# Altium PCB Ultra-Mega-PS-PCB.PcbDoc
Units mm, origin at the board's own origin, x right, y up, seen from the top; angles counter-clockwise.
Board outline 127.08 x 64.9 mm, 4 copper layers (Component Side, Ground Plane, Power Plane, Solder Side), stack 0.844 mm thick; 99 components, 48 nets, 279 pads, 237 vias.
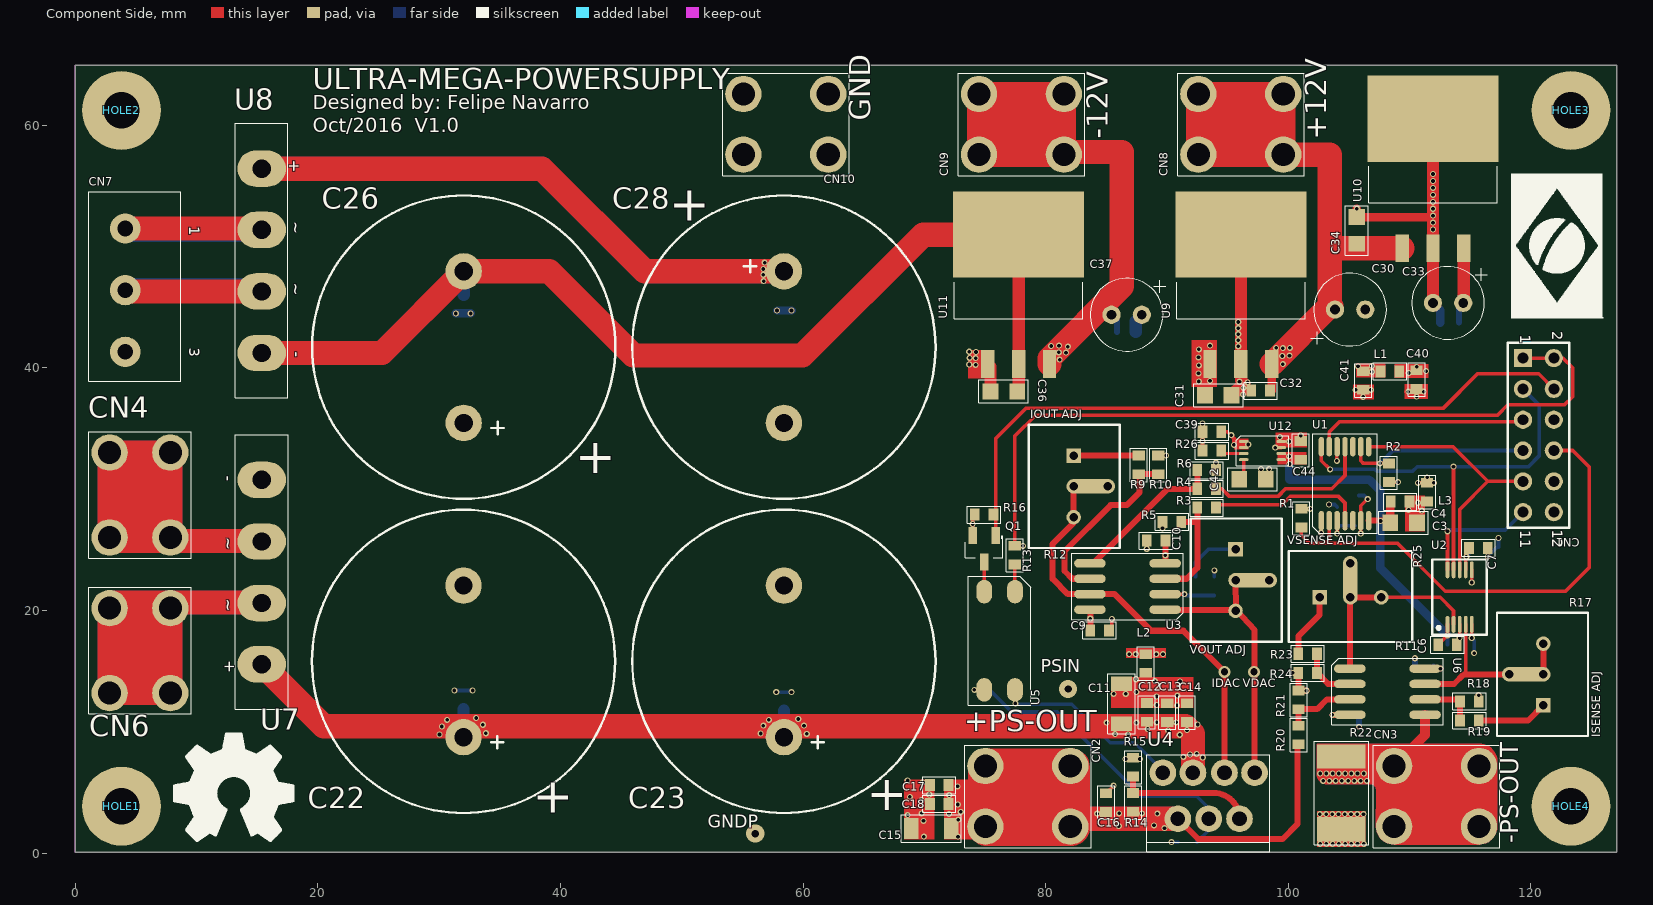
[diagram p0: Component Side view]
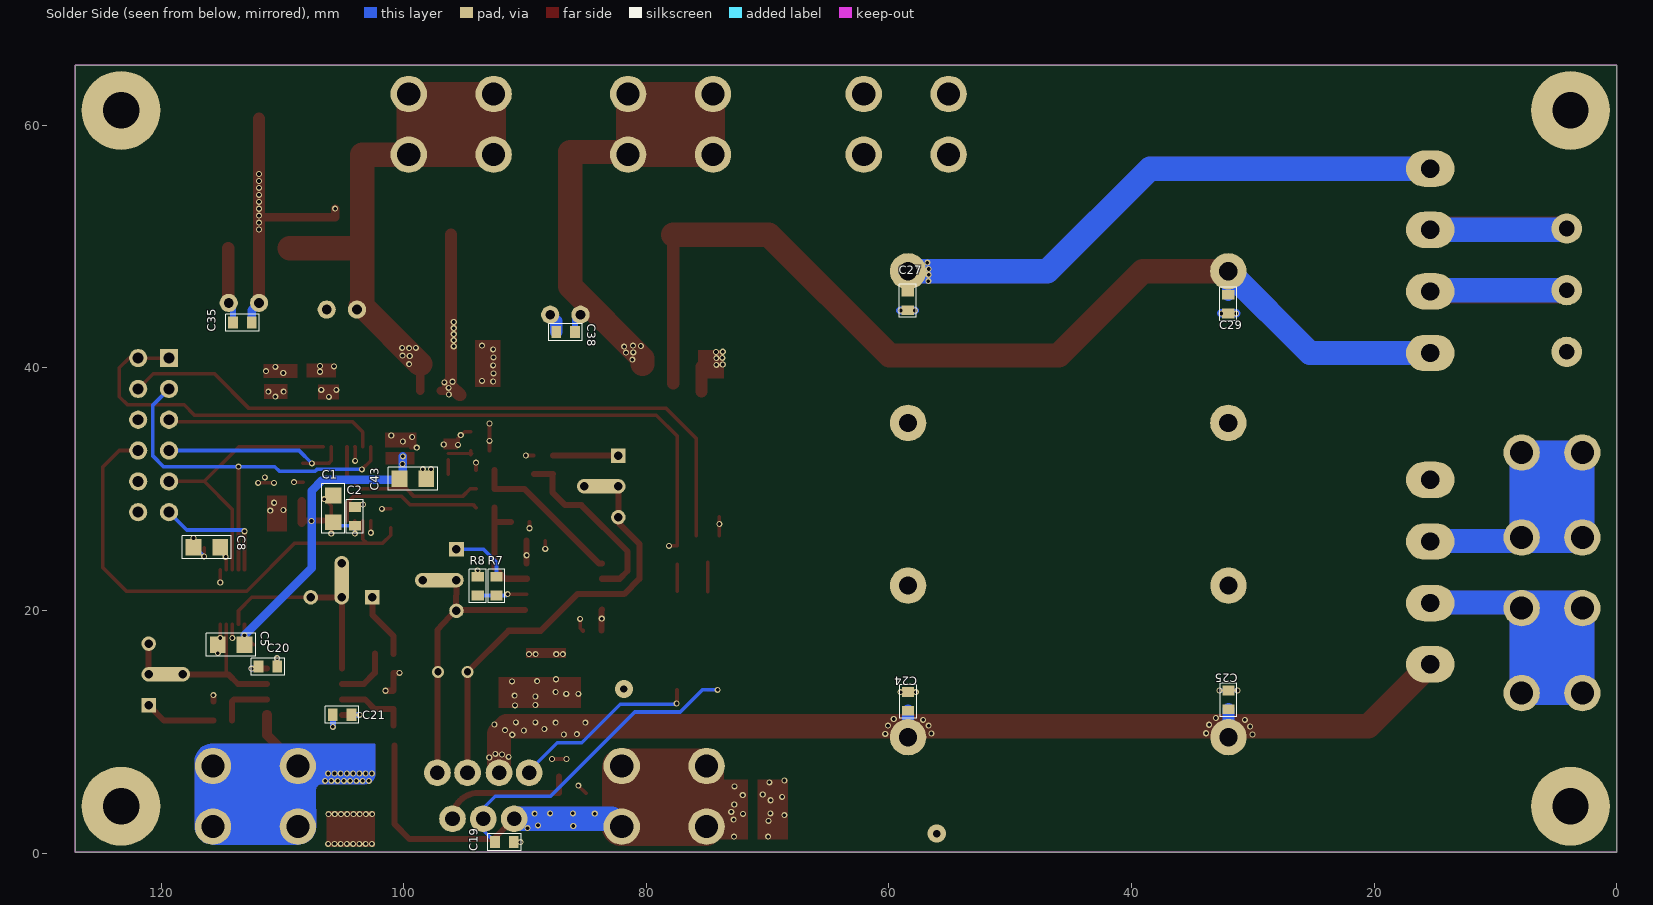
[diagram p1: Solder Side view, seen from below]
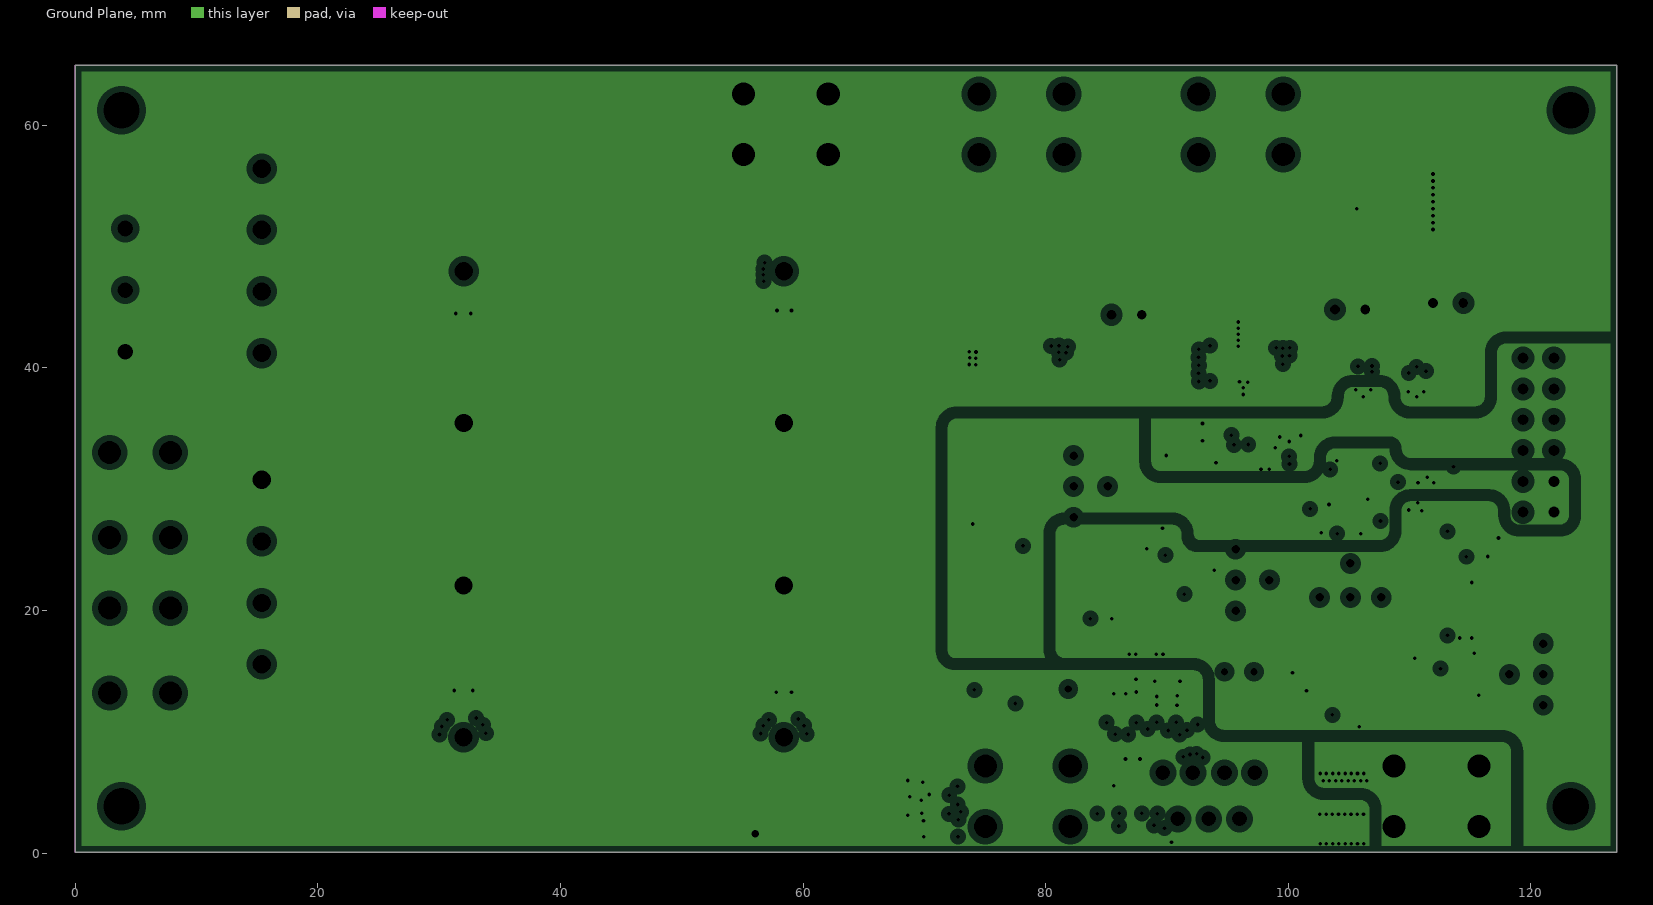
[diagram p2: Ground Plane, clearances drawn from the general rule]
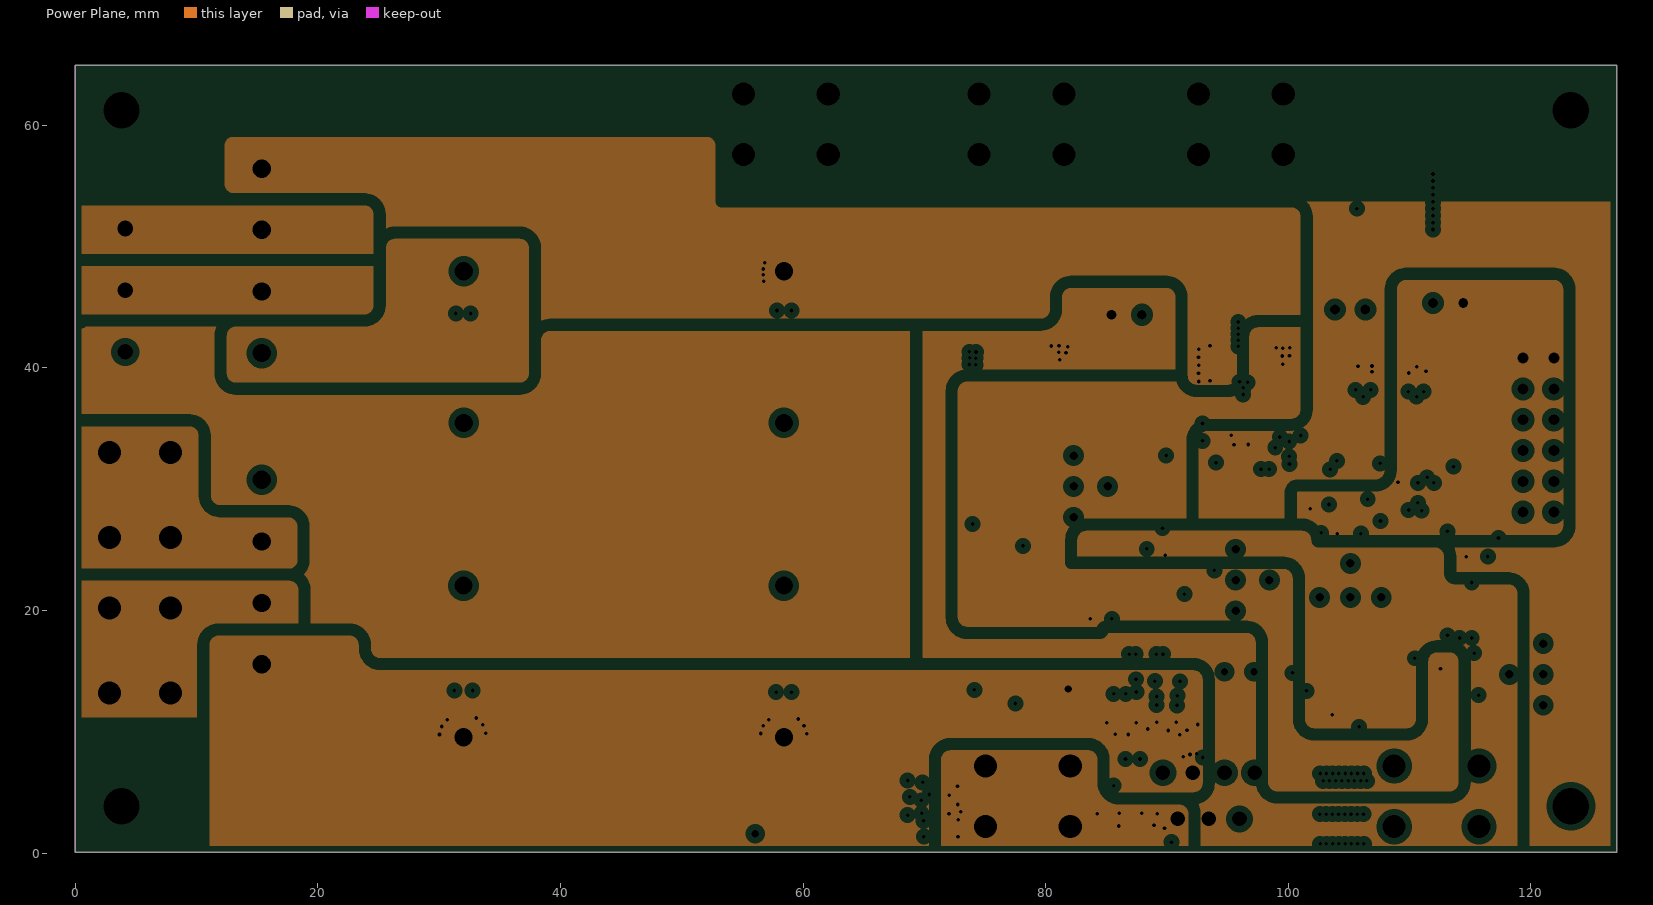
[diagram p3: Power Plane, clearances drawn from the general rule]

## Layer stack, top to bottom
Top Solder: solder mask 0.0102, Solder Resist, Dk 3.5
Component Side: signal copper 0.0356
Dielectric 1: core 0.32, FR-4, Dk 4.8
Ground Plane: plane copper 0.036, net (Multiple Nets)
Dielectric 3: prepreg 0.127, Dk 4.2
Power Plane: plane copper 0.036, net (Multiple Nets)
Dielectric 4: core 0.254, Dk 4.2
Solder Side: signal copper 0.0356
Bottom Solder: solder mask 0.0102, Solder Resist, Dk 3.5

## Board outline
0,0.05 127.075,0.05 127.075,64.95 0,64.95

## Design rules (kind name [scope] priority, off if disabled: settings)
Clearance [All] p1: gap=0.254
HoleToHoleClearance [All] p1 off: gap=0.254 allowstackedmicrovias=TRUE
MinimumSolderMaskSliver [All] p1 off: minsoldermaskwidth=0.254
PlaneClearance [All] p1: clearance=0.508
PlaneConnect [All] p1: planeconnectstyle=Direct reliefexpansion=0.508 reliefentries=4 reliefconductorwidth=0.254 reliefairgap=0.254
PolygonConnect [All] p1: connectstyle=Direct reliefconductorwidth=0.254 reliefentries=4 polygonreliefangle="90 Angle" airgapwidth=0.254
RoutingVias [All] p1: holewidth=0.711 width=1.27 viastyle="Through Hole" minholewidth=0.711 minwidth=1.27 maxholewidth=3 maxwidth=3
SilkToSilkClearance [All] p1 off: silktosilkclearance=0.254
SilkToSolderMaskClearance [IsPad] p1 off: minsilkscreentomaskgap=0.254 clearancetoexposedcopper=TRUE
SolderMaskExpansion [All] p1: expansion=0.102
Width [All] p1: maxlimit=5 minlimit=0.254 preferedwidth=0.254
24 further rules are at their usual default settings.

## Classes and differential pairs
component class Ultra-Mega-PS-Block-V1.00: CN1 HOLE1 HOLE2 HOLE3 HOLE4
component class "Power Supplies": C22 C23 C24 C25 C26 C27 C28 C29 C30 C31 C32 C33 C34 C35 C36 C37 C38 C39 C40 C41 C42 C43 C44 CN4 CN6 CN7 CN8 CN9 CN10 L1 L2 L3 R26 U7 U8 U9 U10 U11 U12
component class "Power Stage": C11 C12 C13 C14 C15 C16 C17 C18 C19 C20 C21 CN2 CN3 Q1 R13 R14 R15 R16 R17 R18 R19 R20 R21 R22 R23 R24 R25 U4 U5 U6
component class DAC/ADC: C1 C2 C3 C4 C5 C6 C7 C8 C9 C10 R1 R2 R3 R4 R5 R6 R7 R8 R9 R10 R11 R12 U1 U2 U3

## Components (designator, comment, footprint, x,y, rotation, side; value= is the part's Value field where it differs from the comment)
C1 "Capacitor Cerâmico" CC0805 105.8,28.375 r270 bottom
C2 "Capacitor Cerâmico" CC0603 104.025,27.75 r270 bottom
C3 "Capacitor Cerâmico" CC0805 109.5,27.225 r180 top
C4 "Capacitor Cerâmico" CC0603 109.225,28.975 r180 top
C5 "Capacitor Cerâmico" CC0805 114.225,17.175 r180 bottom
C6 "Capacitor Cerâmico" CC0603 113.125,17.175 r180 top
C7 "Capacitor Cerâmico" CC0603 115.675,25.15 r180 top
C8 "Capacitor Cerâmico" CC0805 116.225,25.2 r180 bottom
C9 "Capacitor Cerâmico" CC0603 84.45,18.35 r180 top
C10 "Capacitor Cerâmico" CC0603 89.1,25.75 r0 top
C11 "Capacitor Cerâmico" CC1206 86.25,12.3 r270 top
C12 "Capacitor Cerâmico" CC0603 88.35,11.6 r270 top
C13 "Capacitor Cerâmico" CC0603 90.025,11.575 r270 top
C14 "Capacitor Cerâmico" CC0603 91.65,11.575 r270 top
C15 "Capacitor Cerâmico" CC1206 70.575,2.025 r0 top
C16 "Capacitor Cerâmico" CC0603 84.975,4.15 r270 top
C17 "Capacitor Cerâmico" CC0603 71.225,5.6 r0 top
C18 "Capacitor Cerâmico" CC0603 71.225,4.05 r0 top
C19 "Capacitor Cerâmico" CC0603 91.7,0.9 r0 bottom
C20 "Capacitor Cerâmico" CC0603 111.2,15.375 r0 bottom
C21 "Capacitor Cerâmico" CC0603 105.075,11.395 r180 bottom
C22 "Capacitor Eletrolítico" "CAP NICHICON 25x40" 32.004,15.798 r270 top
C23 "Capacitor Eletrolítico" "CAP NICHICON 25x40" 58.42,15.798 r270 top
C24 "Capacitor Cerâmico" CC0603 58.42,12.496 r270 bottom
C25 "Capacitor Cerâmico" CC0603 32.004,12.623 r270 bottom
C26 "Capacitor Eletrolítico" "CAP NICHICON 25x40" 58.42,41.706 r90 top
C27 "Capacitor Cerâmico" CC0603 58.45,45.525 r90 bottom
C28 "Capacitor Eletrolítico" "CAP NICHICON 25x40" 32.019,41.706 r270 top
C29 "Capacitor Cerâmico" CC0603 32.025,45.25 r270 bottom
C30 "Capacitor Eletrolítico" CPOLRAD6X12 105.1,44.8 r180 top
C31 "Capacitor Cerâmico" CC0805 94.225,37.75 r180 top
C32 "Capacitor Cerâmico" CC0603 97.725,38.125 r0 top
C33 "Capacitor Eletrolítico" CPOLRAD6X12 113.175,45.35 r0 top
C34 "Capacitor Cerâmico" CC0805 105.65,51.325 r270 top
C35 "Capacitor Cerâmico" CC0603 113.3,43.725 r0 bottom
C36 "Capacitor Cerâmico" CC0805 76.55,38.05 r0 top
C37 "Capacitor Eletrolítico" CPOLRAD6X12 86.675,44.375 r0 top
C38 "Capacitor Cerâmico" CC0603 86.65,42.95 r180 bottom
C39 "Capacitor Cerâmico" CC0603 93.7,34.725 r0 top
C40 "Capacitor Cerâmico" CC0603 110.575,39.025 r90 top
C41 "Capacitor Cerâmico" CC0603 106.175,38.95 r90 top
C42 "Capacitor Cerâmico" CC0805 97.05,30.825 r180 top
C43 "Capacitor Cerâmico" CC0805 99.25,30.85 r0 bottom
C44 "Capacitor Cerâmico" CC0603 101.025,33.2 r270 top
CN1 "Header 6X2" "CONN HDR2X6" 119.35,40.8 r270 top
CN2 "Screw M3" CONN_MASSA-M3 78.525,4.675 r90 top
CN3 "Screw M3" CONN_MASSA-M3 112.225,4.675 r90 top
CN4 "Screw M3" CONN_MASSA-M3 5.334,29.514 r0 top
CN6 "Screw M3" CONN_MASSA-M3 5.334,16.687 r0 top
CN7 "Screw" "CONN SCREW-3N P5.08" 4.121,46.4 r270 top
CN8 "Screw M3" CONN_MASSA-M3 96.083,60.075 r90 top
CN9 "Screw M3" CONN_MASSA-M3 78,60.075 r90 top
CN10 "Screw M3" CONN_MASSA-M3 58.575,60.075 r90 top
HOLE1 "Furo de Fixação" Furo_M3 3.81,3.86 r0 top
HOLE2 "Furo de Fixação" Furo_M3 3.81,61.225 r0 top
HOLE3 "Furo de Fixação" Furo_M3 123.3,61.225 r0 top
HOLE4 "Furo de Fixação" Furo_M3 123.3,3.86 r0 top
L1 "Bead" CC0603 108.375,39.7 r180 top
L2 "Bead" CC0603 88.25,15.625 r90 top
L3 "Bead" CC0603 111.45,29.75 r270 top
Q1 "BSS138L" SOT-23-3N 74.925,25.075 r270 top
R1 "Resistor" CC0603 101.075,27.6 r90 top
R2 "Resistor" CC0603 108.3,31.35 r270 top
R3 "Resistor" CC0603 93.275,28.475 r0 top
R4 "Resistor" CC0603 93.275,30.025 r0 top
R5 "Resistor" CC0603 90.4,27.3 r0 top
R6 "Resistor" CC0603 93.275,31.575 r180 top
R7 "Resistor" CC0603 92.35,22 r270 bottom
R8 "Resistor" CC0603 93.9,22 r90 bottom
R9 "Resistor" CC0603 87.675,32 r270 top
R10 "Resistor" CC0603 89.275,32 r90 top
R11 "Potenciômetro" POT 95.65,22.5 r270 top locked
R12 "Potenciômetro" POT 82.3,30.225 r270 top
R13 "Resistor" CC0603 77.45,24.55 r270 top
R14 "Resistor" CC0603 87.2,4.175 r90 top
R15 "Resistor" CC0603 87.2,7.075 r270 top
R16 "Resistor" CC0603 74.925,27.9 r0 top
R17 "Potenciômetro" POT 121.025,14.725 r90 top
R18 "Resistor" CC0603 114.925,12.5 r180 top
R19 "Resistor" CC0603 114.925,10.925 r0 top
R20 "Resistor" CC0603 100.85,9.725 r270 top
R21 "Resistor" CC0603 100.85,12.625 r270 top
R22 "Resistor" CC2512 104.375,4.95 r90 top
R23 "Resistor" CC0603 101.6,16.425 r0 top
R24 "Resistor" CC0603 101.6,14.85 r180 top
R25 "Potenciômetro" POT 105.125,21.075 r0 top
R26 "Resistor" CC0603 93.7,33.175 r0 top
U1 "DAC60004" TSSOP-14N 104.675,30.45 r90 top
U2 "ADC122S625" MSOP10 114.125,21.1 r90 top
U3 "OPA2197" SOIC-8N 86.75,21.975 r180 top
U4 "OPA548" TO-220-7N 93.439,2.819 r180 top
U5 "PC817XNNIP0F" SMD-4N 76.2,17.5 r270 top
U6 "OPA2197" SOIC-8N 108.175,13.3 r0 top
U7 "GBU1006" GBU1006 15.367,23.164 r270 top
U8 "GBU1006" GBU1006 15.367,48.818 r90 top
U9 "LM2940CS-12" TO263-4N 96.087,46.85 r90 top
U10 "LM2940CS-5" TO263-4N 111.925,56.4 r90 top
U11 "LM2990S-12" TO263-4N 77.775,46.85 r90 top
U12 "REF6045" VFSOP-8N 97.875,33.175 r0 top

## Footprints (in the part's own frame and the unit in brackets; to place one, negate y for a bottom-side part, rotate by r counter-clockwise, add the part's x,y. Pads: shape width x height; smd on the part's side, far side on the other; paste and mask are expansions set on the pad)
"CAP NICHICON 25x40" [mm]
  round 3 hole 1.5: 1(-6.25,0) 2(6.25,0)
  silkscreen extent -12.5,-12.5 12.5,12.5, body extent -12.7,-12.71 12.7,12.69, height 42.2
CC0603 [mm] "Chip Resistor, 2-Leads, Body 1,6x0,8mm, IPC Medium Density"
  rect 0.8x1 smd: 1(-0.77,0) 2(0.77,0)
  silkscreen extent -1.38,-0.7 1.38,0.7, body extent -0.8,-0.42 0.8,0.43, height 0.45
CC0805 [mm] "Chip Resistor, 2-Leads, Body 2,0x1,2mm, IPC Medium Density"
  rect 1.3x1.35 smd: 1(-1.1,0) 2(1.1,0)
  silkscreen extent -2.05,-0.95 2.02,0.95, body extent -1,-0.62 1,0.63, height 0.6
CC1206 [mm] "Chip Resistor, 2-Leads, Body 3,2x1,6mm, IPC Medium Density"
  rect 1.2x1.75 smd: 1(-1.65,0) 2(1.65,0)
  silkscreen extent -2.47,-1.15 2.47,1.15, body extent -1.6,-0.8 1.6,0.8, height 1
CC2512 [mm] "Chip Resistor, 2-Leads, Body 6,5x3,3mm, IPC High Density"
  rect 2x4 smd: 1(-3,0) 2(3,0)
  silkscreen extent -4.26,-2.26 4.25,2.25, body extent -3.17,-1.6 3.18,1.6, height 0.47
"CONN HDR2X6" [mm] "Connector; Header; 6x2 Position"
  rect 1.5x1.5 hole 0.9: 1(0,0)
  round 1.5 hole 0.9: 2(0,2.54) 3(2.54,0) 4(2.54,2.54) 5(5.08,0) 6(5.08,2.54) 7(7.62,0) 8(7.62,2.54) 9(10.16,0) 10(10.16,2.54) 11(12.7,0) 12(12.7,2.54)
  silkscreen extent -1.27,-1.27 13.97,3.81, body extent -1.27,-1.27 13.97,3.81, height 8.51
"CONN SCREW-3N P5.08" [mm]
  round 2.5 hole 1.3: 1(-5.08,0) 2(0,0) 3(5.08,0)
  silkscreen extent -8.11,-3.01 7.49,4.59, body extent -8.11,-3.01 7.49,4.59, height 10
CONN_MASSA-M3 [mm]
  round 3 hole 1.9: 1(-2.5,-3.5) 2(2.5,-3.5) 3(2.5,3.5) 4(-2.5,3.5)
  silkscreen extent -4.22,-5.22 4.22,5.21, body extent -4,-4 4,4, height 8.5
CPOLRAD6X12 [mm]
  round 1.5 hole 0.8: 1(1.25,0) 2(-1.25,0)
  silkscreen extent -3,-3 3.24,3, body extent -2.98,-3.01 3,2.98, height 12
Furo_M3 [mm] "Furo metalizado para parafuso M3"
  round 6.5 hole 3 paste+0: X(0,0)
  body extent -2.8,-2.8 2.8,2.8, height 2.38
GBU1006 [mm] "Conversosr DC-DC, SIP, 4 Pin"
  oval 3x4 hole 1.5: 1(-7.6,0) 2(-2.52,0) 3(2.56,0) 4(7.6,0)
  silkscreen extent -11.3,-2.16 11.32,2.2, body extent -11.15,-1.5 11.15,2.06, height 22.83
MSOP10 [mm]
  oval 1.4x0.3 smd: 1(-2.25,1) 2(-2.25,0.5) 3(-2.25,0) 4(-2.25,-0.5) 5(-2.25,-1) 6(2.25,-1) 7(2.25,-0.5) 8(2.25,0) 9(2.25,0.5) 10(2.25,1)
  silkscreen extent -3.1,-2.25 3.1,2.25, body extent -2.5,-1.5 2.53,1.5, height 1.05
POT [mm] "Thru-Hole; 3 Leads"
  rect 1.2x1.2 hole 0.7: 1(-2.54,0)
  oval 1.2x4 hole 0.7 copper offset 0,1.4: 2(0,0)
  round 1.2 hole 0.7: 3(2.54,0)
  silkscreen extent -5.08,-3.68 5.08,3.82, body extent -4.6,-2.41 4.6,2.39, height 12.01
SMD-4N [mm] "SOP, 4-Leads, Body 4,6x6,5mm (max), Pitch 2,54mm, IPC Medium Density"
  oval 1.95x1.3 smd: 1(-4.05,1.27) 2(-4.05,-1.27) 3(4.05,-1.27) 4(4.05,1.27)
  silkscreen extent -5.31,-2.58 5.32,2.59, body extent -5.1,-2.29 5.06,2.3, height 3.85
SOIC-8N [mm] "SOIC, 8-Leads, Body 4.9x3.9mm, Pitch 1.27mm, IPC Medium Density"
  oval 2.6x0.7 smd: 1(-3.1,1.905) 2(-3.1,0.635) 3(-3.1,-0.635) 4(-3.1,-1.905) 5(3.1,-1.905) 6(3.1,-0.635) 7(3.1,0.635) 8(3.1,1.905)
  silkscreen extent -4.61,-2.73 4.6,2.76, body extent -2.9,-2.4 2.9,2.4, height 1.75
SOT-23-3N [mm] "SOT23, 3-Leads, Body 3,1x2,7mm (max), Pitch 0,95mm, IPC Medium Density"
  rect 1.4x0.7 smd: 1(-1.1,0.95) 2(-1.1,-0.95) 3(1.1,0)
  silkscreen extent -1.1,-1.55 0.75,1.55, body extent -1.4,-1.45 1.4,1.45, height 1.25
TO263-4N [mm] "D2-PAK, 4-Pads, Body 8,9x10,4mm (max), IPC High Density"
  rect 2.3x1.1 smd: 1(-6.545,2.54) 2(-6.545,0) 3(-6.545,-2.54)
  rect 7.1x10.8 smd: 4(4.13,0)
  silkscreen extent -2.8,-5.3 0.2,5.3, body extent -7.74,-5 7.93,5, height 4.78
TO-220-7N [mm]
  round 2.2 hole 1.2: 1(-3.78,-3.8) 2(-2.54,0) 3(-1.3,-3.8) 4(0,0) 5(1.3,-3.8) 6(2.54,0) 7(3.78,-3.8)
  silkscreen extent -5.05,-5.29 5.11,2.72, body extent -5.05,-4.02 5.11,2.72, height 21.3
TSSOP-14N [mm] "TSsOP, 14-Leads, Body 5,1x4,5mm (max), Pitch 0,65mm, IPC High Density"
  oval 1.6x0.45 smd: 1(-3.05,1.95) 2(-3.05,1.3) 3(-3.05,0.65) 4(-3.05,0) 5(-3.05,-0.65) 6(-3.05,-1.3) 7(-3.05,-1.95) 8(3.05,-1.95) 9(3.05,-1.3) 10(3.05,-0.65) 11(3.05,0) 12(3.05,0.65) 13(3.05,1.3) 14(3.05,1.95)
  silkscreen extent -4.1,-2.65 4.1,2.65, body extent -3.2,-2.55 3.2,2.55, height 1.2
VFSOP-8N [mm] "TSSOP, 8-Leads, Body 2,1x2,4mm (max), Pitch 0,50mm, IPC Medium Density"
  oval 0.8x0.25 smd: 1(-1.55,0.75) 2(-1.55,0.25) 3(-1.55,-0.25) 4(-1.55,-0.75) 5(1.55,-0.75) 6(1.55,-0.25) 7(1.55,0.25) 8(1.55,0.75)
  silkscreen extent -2.15,-1.24 2.16,1.24, body extent -1.2,-1.05 1.2,1.05, height 0.9

## Part data
C1 C3 C5 C8 C31 C34 C36 C42 C43: library part "Cap 10uF 25V 0805 X5R", "Capacitor (Semiconductor SIM Model)"
C2 C4 C6 C7 C9 C10 C12 C16 C19 C20 C21 C24 C25 C27 C29 C32 C35 C38 C39 C40 C41 C44: library part "Cap 100nF 50V 0603 X7R", "Capacitor (Semiconductor SIM Model)"
C11 C15: library part "Cap 10uF 50V 1206 X5R", "Capacitor (Semiconductor SIM Model)"
C13 C17: library part "Cap 10nF 50V 0603 X7R 5%", "Capacitor (Semiconductor SIM Model)"
C14 C18: library part "Cap 1nF 50V 0603 X7R", "Capacitor (Semiconductor SIM Model)"
C22 C23 C26 C28: library part "PCap 4700uF 63V", "Polarized Capacitor (Radial)"
C30 C33 C37: library part "PCap 47uF 63V 6d.x12h.", "Polarized Capacitor (Radial)"
CN1: "Header, 6-Pin, Dual row"
CN2 CN3 CN4 CN6 CN8 CN9 CN10: library part "Screw Snap-Fit M3", "TERM PCB SNAP-IN VERT M3 THREAD"
CN7: library part "Screw-3 125V 6A P2.54mm", "Conector Screw Block"
HOLE1 HOLE2 HOLE3 HOLE4: library part Parafuso, "Furo para parafuso"
L1 L2 L3: library part "Bd 1K@100MHz 0603 400mA"
Q1: library part "TRS BSS138 50V 200mA SOT-23-3N", "N-Channel Power MOSFET"
R1 R2 R16: library part "Res 10K 1% 0603 1/10W"
R3 R4 R5 R6 R7 R8 R9 R10 R18 R19 R20 R21 R23 R24 R26: library part "Res - $Val $% $Footprint $Pot"
R11 R12 R17 R25: library part "Res Trim", "Trimmer"
R13: library part "Res 470R 5% 0603 1/10W"
R14: library part "Res 9K09 1% 0603 1/10W"
R15: library part "Res 1K 1% 0603 1/10W"
R22: library part "Res 0R01 1% 2512 3W"
U1: library part DAC6004, "DACx0004, Quad 16-,14-,12-Bit, 1 LSB INL, Buffered, Voltage-Output Digital-to-Analog  Converters"
U2: "ADC122S625 Dual 12-Bit, 50 kSPS to 200 kSPS, Simultaneous Sampling A/D Converter"
U3 U6: "OPAx197 36-V, Precision, Rail-to-Rail Input/Output, Low Offset Voltage, Operational Amplifiers"
U4: "High-Voltage, High-Current  OPERATIONAL AMPLIFIER"
U5: library part "OPT PC817", "4-Pin Phototransistor Optocoupler"
U7 U8: library part "BRG GBU1006 600V 10A", "600V 10A"
U9 U10: library part LM2940-15, "Regulador Linear 15V Positivo"
U11: library part LM2990-15, "Regulador Linear 15V Negativo"
U12: library part REF6050, "REF60xx High-Precision Voltage Reference With Integrated ADC Drive Buffer"

## Via types
v1: diameter 0.5, hole 0.3, Component Side to Solder Side, tented both sides, 229 vias
v2: diameter 1.2, hole 0.7, Component Side to Solder Side, 4 vias
v3: diameter 1, hole 0.6, Component Side to Solder Side, 2 vias
v4: diameter 1.5, hole 0.6, Component Side to Solder Side, 2 vias

## Nets (pads, with @x,y where several pads share a name; then routed paths per layer and width w, separated by ;. In a path a pad name is that pad's centre, name@x,y a point inside that pad or via, vN(x,y) a via of type N, cw(c..) or ccw(c..) an arc to the next point about the centre after c; other vN are vias at no path point)
4V5REF: C3.2 C4.2 C5.2 C6.2 C43.2 C44.2 U1.7 U2.1 U12.5 U12.6 | length 31.6
  Component Side w0.3: U12.5 99.8,32.425 v1(100.075,32.7) 99.85,32.925 U12.6 ; C6.2 112.355,17.18 v1(113.125,17.95) U2.1
  Component Side w0.5: U1.7 C3.2@108.225,27.4
  Component Side w0.7: C3.2@108.405,27.23 C4.2@108.405,29
  Solder Side w0.3: C5.2 v1(113.125,17.95)
  Solder Side w0.7: v1(100.075,32.7) 100.075,30.825 100.125,30.775 106.65,30.775 106.696,30.729 106.725,30.729 107.6,29.854 v1(107.6,27.375) 107.6,23.475 v1(113.125,17.95)
  other v1: 100.1,32.075
5V: C1.2 C2.2 C33.1 C35.2 C40.2 CN1.1 CN1.2 L1.1 R1.2 R2.2 R13.1 U1.3 U10.3 | length 76.3
  Component Side w0.3: v1(78.13,25.32) R13.1 77.45,34.375 79.175,36.1 117.25,36.1 118.1,36.95 122.775,36.95 123.45,37.625 123.45,40 122.65,40.8 CN1.2 CN1.1 ; R1.2 v1@101.805,28.37 ; v1(104.025,26.325) U1.3 ; R2.2 v1(109.045,30.58) ; v1(109.93,39.57) C40.2@110.575,39.57 ; C40.2@110.575,39.525 110.775,39.725 v1(111.35,39.725)
  Component Side w1: C33.1@114.465,45.39 U10.3
  Solder Side w0.3: v1(104.025,26.325) C2.2 C1.2@105.505,26.98 ; C33.1@114.07,44.995 C33.1
  Solder Side w0.5: C35.2 C33.1@114.07,44.995
  other v1: 101.8,28.37 110.575,40.075
5VA: C7.2 C8.2 C39.2 C41.2 L1.2 U2.7 U12.1 U12.2 | length 6.1
  Component Side w0.3: C39.2 94.975,34.725 95.525,34.175 v1(95.525,33.65) ; U12.2 95.75,33.425 v1(95.525,33.65) ; U12.1 95.8,33.925 v1(95.525,33.65) ; U2.7 C7.2@114.625,24.87
  Solder Side w0.3: v1(114.675,24.425) 115.125,24.875 C8.2
  other v1: 96.7,33.675 95.3,34.45 106.9,39.675 105.75,40.125 106.9,40.15
30VP: C11.2 C12.2 C13.2 C14.2 C22.2 C23.2 C24.2 C25.2 U4.5 U7.4 | length 86.8
  Component Side w2: U7.4 20.481,10.45 91.525,10.45 92.139,9.836 U4.5
  Solder Side w1: C22.2 C25.2 ; C23.2 C24.2
  other v1: 92.948,7.879 91.35,7.925 91.9,8.125 92.45,8.175 91.05,9.75 30.025,9.775 86.8,9.775 85.725,9.8 60.3,9.825 56.5,9.85 33.85,9.875 90.1,10.1 91.65,10.125 88.4,10.225 30.225,10.425 56.725,10.5 60.075,10.5 33.6,10.575 92.525,10.6 85.025,10.75 87.475,10.75 89.15,10.775 90.75,10.775 30.65,10.975 57.175,10.975 59.6,11.05 33.05,11.125
  other v4: 81.85,13.525
+12VA: C9.2 C20.2 C30.1 C32.2 C34.2 CN8.1 CN8.2 CN8.3 CN8.4 U3.8 U6.8 U9.3 U10.1 | length 58.9
  Component Side w0.5: U3.8 cw(c83.578,19.998) 83.68,19.998 C9.2 ; U6.8 v1(112.545,15.205) U6.8@112.55,15.2
  Component Side w0.7: C32.2@98.627,38.125 U9.3
  Component Side w2: U9.3 C30.1@103.425,45.103 ; 103.545,49.855 U10.1 ; C30.1@103.547,45.103 C30.1@103.425,45.103 ; CN8.1 CN8.4 CN8.3 CN8.2 CN8.1 ; CN8.1 103.425,57.575 C30.1@103.425,45.103
  Solder Side w0.5: C20.2 112.14,15.205 v1(112.545,15.205)
  other v1: 83.675,19.325 99.55,40.3 99.5,40.975 100.1,41 99.55,41.625 99,41.65 100.125,41.65
+15V: C26.2 C27.2 C31.2 U8.4 U9.1 | length 95.4
  Component Side w1: v1@92.63,40.305 U9.1 v1(93.547,38.922)
  Component Side w2: U8.4 38.482,56.418 46.945,47.956 C26.2
  Solder Side w2: U8.4 38.482,56.418 46.945,47.956 C26.2
  other v1: 92.625,38.875 93.547,38.922 92.6,39.537 92.63,40.2 92.6,40.862 92.625,41.525 93.547,41.822 56.75,47.15 56.725,47.675 56.725,48.15 56.825,48.675
+VOUT: C15.2 C16.2 C17.2 C18.2 CN2.1 CN2.2 CN2.3 CN2.4 R14.1 R20.2 U4.6 | length 35.7
  Component Side w0.5: U4.6 92.563,1.155 99.53,1.155 100.775,2.4 R20.2@100.775,8.88
  Component Side w2: CN2.1@82.125,2.1 82.844,2.819 U4.6
  Solder Side w2: CN2.1@82.125,2.1 82.844,2.819 U4.6
  other v1: 72.775,1.35 89.8,2.05 86.025,2.225 88.925,2.275 72.8,2.75 72.025,3.225 84.25,3.25 89.2,3.25 86.05,3.275 87.925,3.275 73,3.4 72.75,4 72.05,4.775 72.725,5.5
-12VA: C10.2 C19.2 C21.2 C37.2 C38.2 CN9.1 CN9.2 CN9.3 CN9.4 U3.4 U4.4 U5.3 U6.4 U11.3 | length 81.1
  Component Side w0.3: v1(74.125,13.45) U5.3
  Component Side w0.5: U3.4@89.87,23.88 C10.2 ; v1(103.63,11.395) U6.4
  Component Side w2: U11.3 80.315,40.765 86.275,46.725 86.275,57.8 81.725,57.8 CN9.1 ; CN9.1 CN9.2 CN9.3 CN9.4 CN9.1
  Solder Side w0.3: v1(74.125,13.45) 75.375,13.45 77.204,11.621 80.954,11.621 87.9,4.675 92.45,4.675 93.439,3.686 U4.4 93.439,1.87 C19.2
  Solder Side w0.5: C38.2 C37.2@85.88,43.92 ; v1(103.63,11.395) C21.2
  other v1: 89.87,24.55 81.15,40.675 81.675,41.25 81.075,41.275 81.825,41.75 80.45,41.8 81.1,41.825
-15V: C28.1 C29.1 C36.2 U8.1 U11.2 U11.4 | length 105.8
  Component Side w1: C36.2@77.775,38.705 U11.2 U11.4
  Component Side w2: U8.1 25.281,41.218 C28.1 39.069,47.956 46,41.025 59.95,41.025 69.905,50.98 U11.4
  Solder Side w1: C29.1 C28.1@32.025,47.95
  Solder Side w2: U8.1 25.281,41.218 C28.1
-VOUT: CN3.1 CN3.2 CN3.3 CN3.4 R22.2 U6.5 | length 5.3
  Component Side w0.8: CN3.3 111.275,9.725 U6.5
  other v1: 102.875,5.95 103.389,5.95 103.904,5.95 104.418,5.95 104.932,5.95 105.446,5.95 105.961,5.95 106.475,5.95 102.625,6.55 103.139,6.55 103.654,6.55 104.168,6.55 104.682,6.55 105.196,6.55 105.711,6.55 106.225,6.55
CLRDAC: CN1.7 R2.1 U1.9 | length 15.8
  Component Side w0.3: U1.9 105.975,32.35 106.205,32.12 R2.1
  Solder Side w0.3: v1(107.575,32.125) 108.63,33.18 CN1.7
CSADC: CN1.11 U2.10 | length 10.1
  Component Side w0.3: U2.10 v1(113.125,26.525)
  Solder Side w0.3: v1(113.125,26.525) 113.229,26.629 117.879,26.629 CN1.11
CSDAC: CN1.8 R1.1 U1.2 | length 40.9
  Component Side w0.3: R1.1 101.075,26.2 101.725,25.55 103.05,25.55 ; U1.2 103.371,27.396 103.371,26.054 103.375,26.05 103.375,25.875 103.05,25.55 ; CN1.8 123.445,33.18 124.825,31.8 124.825,23.55 122.85,21.575 112.95,21.575 108.975,25.55 103.05,25.55
E/S: CN1.4 Q1.1 R16.2 | length 56.7
  Component Side w0.3: Q1.1 75.875,34.175 78.354,36.654 112.754,36.654 115.6,39.5 120.65,39.5 CN1.4
GND: C1.1 C2.1 CN1.10 CN1.12 L3.1 Q1.2 R16.1 U1.1 U1.6 U1.12 | length 9.8
  Component Side w0.3: Q1.2 R16.1@73.975,27.72 ; v1(102.705,26.401) 102.705,27.38 U1.1 ; v1(104.005,32.327) 104.005,33.48 U1.12 ; v1(105.975,26.325) U1.6 105.975,28.625 v1@106.55,29.2 ; v1(110.695,30.52) L3.1 v1(112.005,30.52)
  Solder Side w0.3: v1(103.355,28.726) 103.819,28.726 C2.1 ; C1.1 106.25,29.475 v1(106.55,29.175)
  other v1: 73.975,27.125 111.45,30.975
GNDA: C3.1 C4.1 C5.1 C6.1 C7.1 C8.1 C9.1 C10.1 C20.1 C21.1 C39.1 C41.1 C42.1 C43.1 C44.1 L2.2 L3.2 R5.1 R6.1 R8.2 R10.2 R18.1 R21.1 R24.2 R26.1 U2.3 U2.5 U2.6 U12.7 U12.8 | length 23.8
  Component Side w0.3: C9.1 85.22,18.3 85.45,18.53 v1(85.45,19.3) ; v1(88.33,25.075) C10.1 ; R10.2 89.28,32.775 v1(89.925,32.775) ; v1(89.629,26.776) 89.629,27.291 89.625,27.295 R5.1 ; R26.1 v1(92.93,33.975) C39.1 v1(92.93,35.405) ; R6.1 v1(94.045,32.18) ; v1@97.75,31.725 97.75,31.225 C42.1 98.425,31.1 v1(98.425,31.65) ; v1(98.925,33.425) U12.7 ; U12.8 v1@99.825,33.925 ; v1@100.12,33.97 C44.1 v1(101.025,34.425) ; v1(106.175,37.6) C41.1 v1(106.795,38.18) ; v1(114.125,17.725) U2.3 ; v1(115.125,17.725) U2.5 ; v1(115.125,22.3) U2.6 ; C7.1 116.445,24.455 v1(116.45,24.45)
  Component Side w0.5: v1(100.35,14.85) R24.2 R21.1@100.83,13.415 ; R21.1 100.87,13.375 v1(101.5,13.375) ; R18.1 v1(115.695,13.02)
  Solder Side w0.3: R8.2 v1(93.9,23.3) ; v1(115.325,16.475) C5.1 C5.1@115.325,17.525 ; v1(116.45,24.45) 117.325,25.325 C8.1 v1(117.325,25.975)
  Solder Side w0.5: v1(105.845,10.395) C21.1 ; C20.1 v1(110.43,16.055)
  other v1: 86.875,16.4 87.425,16.4 89.125,16.4 89.675,16.4 111,28.225 109.925,28.275 110.675,28.875 97.75,31.65 100.075,33.925 99.3,34.3 105.555,38.18
GNDP: C11.1 C12.1 C13.1 C14.1 C15.1 C16.1 C17.1 C18.1 C19.1 C22.1 C23.1 C24.1 C25.1 C26.1 C27.1 C28.2 C29.2 C30.2 C31.1 C32.1 C33.2 C34.1 C35.1 C36.1 C37.1 C38.1 C40.1 CN7.3 CN10.1 CN10.2 CN10.3 CN10.4 L2.1 R15.1 R22.1 U7.1 U9.2 U9.4 U10.2 U10.4 U11.1 | length 51.7
  Component Side w0.3: C16.1 85.6,5.545 v1(85.6,5.55) ; v1(86.575,7.75) v1(87.775,7.75)
  Component Side w0.7: 96.475,38.125 C32.1 ; v1(105.65,53.125) C34.1 111.8,52.425 v1@111.925,52.3 ; v1(109.9,38.03) v1(111.155,38.03)
  Component Side w1: C36.1 U11.1@75.45,40.09 ; 96.087,38.513 C31.1 95.405,37.75 v1@96.128,38.472 ; v1@96.087,38.975 U9.2 U9.4 ; v1@96.24,38.585 96.368,38.712 ; C33.2 U10.2 111.925,52.3 U10.4
  Solder Side w0.3: v1(31.25,13.393) C25.1 v1(32.758,13.393) ; v1(57.785,13.258) 57.793,13.266 C24.1 v1(59.047,13.266) ; v1(90.375,0.9) C19.1
  Solder Side w0.7: v1(31.37,44.48) C29.2 v1(32.595,44.48) ; v1(57.85,44.725) v1(59.05,44.725) ; C33.2 112.53,44.745 C35.1
  Solder Side w1: C38.1 87.42,43.87 C37.1
  other v1: 102.625,0.75 103.139,0.75 103.654,0.75 104.168,0.75 104.682,0.75 105.196,0.75 105.711,0.75 106.225,0.75 69.95,1.35 69.925,2.65 68.625,3.125 102.6,3.2 103.114,3.2 103.629,3.2 104.143,3.2 104.657,3.2 105.171,3.2 105.686,3.2 106.2,3.2 69.775,3.275 69.75,4.35 68.8,4.625 70.4,4.825 69.85,5.825 68.625,5.975 90.825,12.175 89.15,12.2 89.15,12.9 90.85,12.975 85.6,13.125 86.6,13.125 87.475,13.275 91.075,14.15 89,14.175 87.45,14.325 110.575,37.625 96.275,37.8 96.3,38.35 96.65,38.8 95.975,38.85 74.225,40.25 73.7,40.275 74.225,40.8 73.725,40.825 74.25,41.3 73.7,41.325 95.875,41.775 95.875,42.275 95.875,42.775 95.875,43.275 95.875,43.775 111.925,51.4 111.925,51.972 111.925,52.544 111.925,53.116 111.925,53.687 111.925,54.259 111.925,54.831 111.925,55.403 111.925,55.975
  other v4: 56.05,1.6
IDAC: R12.2 R12.3 U3.7 U4.3 | length 34.2
  Component Side w0.5: R12.2@82.8,30.25 82.3,29.75 82.3,27.21 80.575,25.485 80.575,22.6 81.835,21.34 U3.7 85.685,21.34 88.7,18.325 91.35,18.325 v3(94.739,14.936) U4.3
  other v2: 85.1,30.225
IDACO: R4.2 U1.11 | length 14
  Component Side w0.3: R4.2 94.525,30.025 95.15,29.4 99.15,29.4 99.775,30.025 103.575,30.025 104.675,31.125 U1.11
ISENSE: R17.2 R17.3 U2.4 U6.7 | length 16.8
  Component Side w0.3: 114.45,14.725 114.625,14.9 U2.4
  Component Side w0.5: U6.7 113.66,13.935 114.45,14.725 v2(118.225,14.725) R17.2 R17.3
ISURGE: U1.5
MISO: CN1.9 U1.8 U2.8 | length 22.2
  Component Side w0.3: U1.8 113.58,33.5 116.44,30.64 ; U2.8 114.125,28.325 116.44,30.64 ; CN1.9 116.44,30.64
MOSI: CN1.5 U1.13 | length 17.6
  Component Side w0.3: U1.13 103.375,34.7 104.221,35.546 119.176,35.546 CN1.5
NetC42_2: C42.2 U12.4 | length 1.2
  Component Side w0.254: C42.2@96.325,31.2 U12.4
NetCN4_1: CN4.1 CN4.2 CN4.3 CN4.4 U7.2 | length 63.3
  Component Side w2: CN4.2 CN4.3 CN4.4 CN4.1 3.124,25.724 U7.2@15.367,25.724
  Solder Side w2: CN4.2 CN4.3 CN4.4 CN4.1 3.124,25.724 U7.2@15.367,25.724
NetCN6_1: CN6.1 CN6.2 CN6.3 CN6.4 U7.3 | length 63.4
  Component Side w2: CN6.3 CN6.2 CN6.1 CN6.4 3.291,20.644 U7.3@15.367,20.644
  Solder Side w2: CN6.3 CN6.2 CN6.1 CN6.4 3.291,20.644 U7.3@15.367,20.644
NetCN7_1: CN7.1 U8.3 | length 22.3
  Component Side w2: CN7.1 U8.3@15.265,51.48
  Solder Side w2: CN7.1@4.222,51.378 U8.3
NetCN7_2: CN7.2 U8.2 | length 22.3
  Component Side w2: CN7.2@4.222,46.298 U8.2
  Solder Side w2: CN7.2 U8.2@15.265,46.4
NetQ1_3: Q1.3 U5.2 | length 2.4
  Component Side w0.3: U5.2 Q1.3@74.93,23.97
NetR3_1: R3.1 R5.2 U3.3 | length 9.3
  Component Side w0.5: U3.3 91.61,22.61 92.505,23.505 92.505,27.275 ; R5.2 92.48,27.3 92.505,27.275 ; R3.1 92.505,27.275
NetR4_1: R4.1 R6.2 U3.5 | length 13
  Component Side w0.5: U3.5 83.905,23.88 90.05,30.025 R4.1 R6.2
NetR7_1: R7.1 R11.1 | length 4.9
  Solder Side w0.3: R7.1 92.35,23.975 93.415,25.04 R11.1
NetR7_2: R7.2 R8.1 U3.2 | length 4.1
  Component Side w0.3: U3.2 v1(91.435,21.34)
  Solder Side w0.3: v1(91.435,21.34) 91.545,21.23 R8.1
NetR9_1: R9.1 R12.1 | length 4.9
  Component Side w0.5: R12.1@82.82,32.77 R9.1
NetR9_2: R9.2 R10.1 U3.6 | length 16.8
  Component Side w0.5: U3.6 82.19,22.61 81.55,23.25 81.55,24.875 85.35,28.675 86.7,28.675 87.75,29.725 87.75,31.23 R10.1 R9.2
NetR13_2: R13.2 U5.1 | length 2.2
  Component Side w0.3: U5.1@77.45,21.57 R13.2
NetR14_2: R14.2 R15.2 U4.2 | length 11.4
  Component Side w0.5: R15.2 R14.2 93.853,4.945 cw(c93.853,2.819) U4.2
NetR17_1: R17.1 R19.2 | length 5.9
  Component Side w0.5: R19.2 119.765,10.925 R17.1
NetR18_2: R18.2 R19.1 U6.6 | length 4.5
  Component Side w0.5: U6.6 113.99,12.665 R18.2 R19.1
NetR20_1: R20.1 R21.2 U6.3 | length 5.9
  Component Side w0.5: R20.1 R21.2 102.38,11.855 103.19,12.665 U6.3
NetR23_1: R23.1 R25.1 | length 5.4
  Component Side w0.5: R23.1 100.83,17.88 102.585,19.635 R25.1
NetR23_2: R23.2 R24.1 U6.2 | length 4.7
  Component Side w0.5: R23.2 R24.1 103.285,13.935 U6.2
NetR26_2: R26.2 U12.3 | length 2.4
  Component Side w0.254: R26.2 94.47,32.825 94.37,32.925 U12.3
NetU4_7: U4.7 U5.4 | length 15.7
  Component Side w0.3: v1@77.47,12.355 U5.4
  Solder Side w0.3: v1@77.47,12.275 82.15,12.275 85.325,9.1 87.35,9.1 89.659,6.791 U4.7
  other v1: 77.5,12.325
SCLK: CN1.3 U1.14 U2.9 | length 34.6
  Component Side w0.3: U1.14 102.725,32.35 v1(103.45,31.625) ; U2.9 v1(113.625,31.85)
  Solder Side w0.3: v1(103.45,31.625) 107.15,31.625 107.304,31.471 110.246,31.471 110.625,31.85 119.8,31.85 120.675,32.725 120.675,36.935 CN1.3
VDAC: R11.2 R11.3 U3.1 U4.1 | length 22.2
  Component Side w0.5: U3.1@90.01,20.035 R11.3@95.7,20.035 ; R11.2 R11.3@95.7,20.035 ; U4.1 97.219,18.391 R11.3@95.7,20.035
  other v2: 98.45,22.5
  other v3: 97.175,14.936
VDACO: R3.2 U1.4 | length 12.7
  Component Side w0.3: R3.2 94.295,28.725 99.5,28.725 100.2,29.425 104.1,29.425 104.675,28.85 U1.4
VSENSE: R25.2 R25.3 U2.2 U6.1 | length 15.9
  Component Side w0.3: R25.3 112.525,21.075 113.625,19.975 U2.2
  Component Side w0.5: U6.1 R25.2@105.075,21.025 ; R25.2 R25.3
  other v2: 105.125,23.875
pads on no net: CN1.6 HOLE1.X HOLE2.X HOLE3.X HOLE4.X U1.10

## Polygon pours and split planes (outlines as drawn)
GNDA on Ground Plane (split plane): 384 vertices, not listed, extent 80.801,0.561 126.565,41.999
-VOUT on Ground Plane (split plane): 49 vertices, not listed, extent 102.151,0.561 118.374,9.149
GND on Ground Plane (split plane): 247 vertices, not listed, extent 71.926,16.077 123.149,35.824
GNDP on Ground Plane (split plane): 204 vertices, not listed, extent 0.51,0.561 126.565,64.44
5V on Power Plane (split plane): 83 vertices, not listed, extent 100.702,26.201 122.674,47.249
+12VA on Power Plane (split plane): 271 vertices, not listed, extent 72.751,5.076 114.049,43.349
+15V on Power Plane (split plane): 206 vertices, not listed, extent 12.301,38.601 101.024,59.05
5VA on Power Plane (split plane): 85 vertices, not listed, extent 12.476,38.776 37.399,50.649
5VA on Power Plane (split plane): 162 vertices, not listed, extent 92.601,0.561 126.565,53.725
-12VA on Power Plane (split plane): 357 vertices, not listed, extent 69.827,0.561 118.899,46.599
+VOUT on Power Plane (split plane): 60 vertices, not listed, extent 71.376,0.561 91.774,8.474
NetCN7_1 on Power Plane (split plane): 18 vertices, not listed, extent 0.51,49.377 24.599,53.399
NetCN7_2 on Power Plane (split plane): 20 vertices, not listed, extent 0.51,44.383 24.599,48.373
5VA on Power Plane (split plane): 0.656,43.368 0.656,43.398 0.727,43.398
NetCN4_1 on Power Plane (split plane): 62 vertices, not listed, extent 0.51,23.452 18.324,35.174
5VA on Power Plane (split plane): 171 vertices, not listed, extent 0.51,16.077 68.823,43.398
30VP on Power Plane (split plane): 126 vertices, not listed, extent 11.051,0.561 92.949,17.924
NetCN6_1 on Power Plane (split plane): 38 vertices, not listed, extent 0.51,11.15 18.399,22.449

## Keep-outs
Keep-Out Layer:
  the board outline again, w0.1

## Other copper
Component Side:
  rectangle net GNDA: 105.325,37.37 107.05,38.62
  rectangle net GNDP: 109.6,37.425 111.5,38.675
  rectangle net 5VA: 105.6,39.2 108,40.375
  rectangle net 5V: 108.775,39.175 111.575,40.325
  rectangle net -12VA: 74.825,57.575 81.5,62.1
  rectangle net +12VA: 92.725,57.675 99.275,62.15
  rectangle net GNDP: 73.6,39.125 75.75,41.475
  rectangle net +15V: 92.025,38.425 94.125,42.275
  rectangle net 5VA: 95.525,33.275 96.725,34.175
  rectangle net GNDA: 98.925,33.425 101.55,34.675
  rectangle net 4V5REF: 99.125,32.025 101.5,33.05
  rectangle net GNDA: 109.625,26.525 111.25,29.475
  rectangle net GNDA: 86.625,16.075 89.9,16.9
  rectangle net GNDP: 68.325,1.125 70.825,6.075
  rectangle net GNDP: 85.375,11.95 92.175,14.525
  rectangle net GNDP: 102.375,0.5 106.375,3.475
  rectangle net +VOUT: 71.6,1.125 76,6.075
  rectangle net NetCN4_1: 2.834,26.014 7.834,33.014
  rectangle net NetCN6_1: 2.834,13.187 7.834,20.187
  region net -VOUT: 107.225,2.175 ccw(c108.7,2.175) 108.7,0.7 115.725,0.7 ccw(c115.725,2.2) 117.225,2.2 117.225,7.55 ccw(c115.75,7.55) 115.75,9.025 102.475,9.025 ccw(c102.475,8.9) 102.35,8.9 102.35,6.5 ccw(c103.175,6.5) 103.175,5.675 106.725,5.675 cw(c106.725,5.15) 107.25,5.15
  region net +VOUT: 75.125,8.6 82.15,8.6 cw(c82.15,7.125) 83.625,7.125 83.625,2.1 cw(c82.125,2.1) 82.125,0.6 75.1,0.6 cw(c75.1,2.075) 73.625,2.075 73.625,7.1 cw(c75.125,7.1)
Solder Side:
  rectangle net NetCN4_1: 2.834,26.014 7.834,33.014
  rectangle net NetCN6_1: 2.834,13.187 7.834,20.187
  region net -VOUT: 107.225,2.175 ccw(c108.7,2.175) 108.7,0.7 115.725,0.7 ccw(c115.725,2.2) 117.225,2.2 117.225,7.55 ccw(c115.75,7.55) 115.75,9.025 102.475,9.025 ccw(c102.475,8.9) 102.35,8.9 102.35,6.5 ccw(c103.175,6.5) 103.175,5.675 106.725,5.675 cw(c106.725,5.15) 107.25,5.15
Ground Plane (plane layer: these items are gaps in the copper):
  lines w1: 88.2,35.875 88.2,32.27 ccw(c89.47,32.27) 89.47,31 101.33,31 ccw(c101.33,32.27) 102.6,32.27 102.6,32.58 cw(c103.87,32.58) 103.87,33.85 108.32,33.85 cw(c108.32,33.32) 108.85,33.32 ccw(c110.12,33.32) 110.12,32.05 122.38,32.05 cw(c122.38,30.78) 123.65,30.78 123.65,27.845 cw(c122.38,27.845) 122.38,26.575 119.07,26.575 cw(c119.07,27.845) 117.8,27.845 117.8,28.23 ccw(c116.53,28.23) 116.53,29.5 110.095,29.5 ccw(c110.095,28.23) 108.825,28.23 108.825,26.57 cw(c107.555,26.57) 107.555,25.3 102.095,25.3 92.5,25.3 cw(c92.5,26.1) 91.7,26.1 ; 92.7,25.3 cw(c92.7,26.3) 91.7,26.3 91.7,26.305 ccw(c90.43,26.305) 90.43,27.575 81.57,27.575 ccw(c81.57,26.305) 80.3,26.305 ; 101.65,9.55 101.65,6.145 ccw(c102.92,6.145) 102.92,4.875 105.93,4.875 cw(c105.93,3.605) 107.2,3.605 107.2,0 ; 116.7,41 116.7,37.595 ; 118.875,0.05 118.875,8.38 ccw(c117.605,8.38) 117.605,9.65 94.72,9.65 cw(c94.72,10.92) 93.45,10.92 93.45,14.305 ccw(c92.18,14.305) 92.18,15.575 ; 127.125,42.55 cw(c127.075,42.55) 127.075,42.5 122.73,42.5 117.97,42.5 ccw(c117.97,41.23) 116.7,41.23 116.7,37.595 ; 80.3,16.845 ccw(c81.57,16.845) 81.57,15.575 92.18,15.575 ; 80.3,16.845 80.3,26.305 ; 80.3,16.845 80.3,26.305 ; 92.18,15.575 72.525,15.575 cw(c72.525,16.675) 71.425,16.675 71.425,35.055 cw(c72.695,35.055) 72.695,36.325 102.805,36.325 ccw(c102.805,37.595) 104.075,37.595 104.075,37.655 cw(c105.345,37.655) 105.345,38.925 107.48,38.925 cw(c107.48,37.655) 108.75,37.655 108.75,37.595 ccw(c110.02,37.595) 110.02,36.325 115.43,36.325 ccw(c115.43,37.595) 116.7,37.595
Power Plane (plane layer: these items are gaps in the copper):
  rectangle: 0.05,54.3 12.05,59.3
  rectangle: 0,59.05 53.725,64.95
  rectangle: 53.275,53.725 127.075,64.95
  rectangle: -0.05,0.05 10.325,11.15
  lines w1: 0,22.95 17.63,22.95 ; 0,35.675 9.405,35.675 cw(c9.405,34.405) 10.675,34.405 10.675,29.445 ccw(c11.945,29.445) 11.945,28.175 17.555,28.175 cw(c17.555,26.905) 18.825,26.905 18.825,24.145 cw(c17.63,24.145) 17.63,22.95 ; 0,43.9 0,48.875 24.725,48.875 ; 0,52.63 0,53.9 13.07,53.9 ; 0.51,43.754 cw(c0.656,43.754) 0.656,43.9 13.245,43.9 ; 10.55,-0.05 10.55,17.155 cw(c11.82,17.155) 11.82,18.425 22.605,18.425 cw(c22.605,17.155) 23.875,17.155 23.875,16.845 ccw(c25.145,16.845) 25.145,15.575 92.18,15.575 cw(c92.18,14.305) 93.45,14.305 93.45,12.05 93.45,5.77 cw(c92.18,5.77) 92.18,4.5 91.005,4.5 ; 18.9,18.5 18.9,21.68 ccw(c17.63,21.68) 17.63,22.95 ; 69.325,43.35 69.325,15.975 ccw(c69.6,15.975) 69.6,15.7 ; 70.85,0.05 70.875,0.05 70.875,7.705 cw(c72.145,7.705) 72.145,8.975 83.505,8.975 cw(c83.505,7.705) 84.775,7.705 84.775,5.77 ccw(c86.045,5.77) 86.045,4.5 91.005,4.5 ; 92.1,27.175 92.1,34.03 cw(c93.37,34.03) 93.37,35.3 100.255,35.3 ccw(c100.255,36.57) 101.525,36.57 101.525,39.37 101.525,52.455 ccw(c100.255,52.455) 100.255,53.725 59.3,53.725 53.275,53.725 53.275,58.305 ccw(c52.005,58.305) 52.005,59.575 13.07,59.575 ccw(c13.07,58.305) 11.8,58.305 11.8,55.17 ccw(c13.07,55.17) 13.07,53.9 ; 92.275,0.1 92.275,3.23 ccw(c91.005,3.23) 91.005,4.5 ; 100.2,27.1 100.2,29.725 cw(c100.775,29.725) 100.775,30.3 107.18,30.3 ccw(c107.18,31.57) 108.45,31.57 108.45,46.48 cw(c109.72,46.48) 109.72,47.75 ; 101.375,43.85 97.545,43.85 ccw(c97.545,42.58) 96.275,42.58 96.275,39.37 cw(c95.005,39.37) 95.005,38.1 94.575,38.1 92.47,38.1 cw(c92.47,39.37) 91.2,39.37 ; 119.4,0.1 119.4,21.385 ccw(c118.13,21.385) 118.13,22.655 113.745,22.655 cw(c113.745,23.05) 113.35,23.05 113.35,24.43 ccw(c112.08,24.43) 112.08,25.7 ; 13.07,53.9 23.83,53.9 cw(c23.83,52.63) 25.1,52.63 25.1,49.88 ; 13.245,43.9 ccw(c13.245,42.63) 11.975,42.63 11.975,39.545 ccw(c13.245,39.545) 13.245,38.275 36.63,38.275 ccw(c36.63,39.545) 37.9,39.545 ; 13.245,43.9 17.925,43.9 23.83,43.9 ccw(c23.83,45.17) 25.1,45.17 25.1,49.88 ; 25.1,49.88 cw(c26.37,49.88) 26.37,51.15 36.63,51.15 cw(c36.63,49.88) 37.9,49.88 37.9,39.545 ; 37.9,39.545 37.9,42.28 cw(c39.17,42.28) 39.17,43.55 54.545,43.55 79.58,43.55 ccw(c79.58,44.82) 80.85,44.82 80.85,45.83 cw(c82.12,45.83) 82.12,47.1 89.93,47.1 cw(c89.93,45.83) 91.2,45.83 91.2,39.37 ; 91.2,39.37 73.52,39.37 ccw(c73.52,38.1) 72.25,38.1 72.25,19.42 ccw(c73.52,19.42) 73.52,18.15 82.525,18.15 84.425,18.15 ccw(c84.425,18.425) 84.7,18.425 cw(c84.925,18.425) 84.925,18.65 96.555,18.65 cw(c96.555,17.38) 97.825,17.38 97.825,5.845 ccw(c99.095,5.845) 99.095,4.575 113.28,4.575 ccw(c113.28,5.845) 114.55,5.845 114.55,15.78 ccw(c113.28,15.78) 113.28,17.05 112.295,17.05 ccw(c112.295,15.78) 111.025,15.78 111.025,11.045 cw(c109.755,11.045) 109.755,9.775 102.145,9.775 cw(c102.145,11.045) 100.875,11.045 100.875,20.03 100.875,22.655 ccw(c99.605,22.655) 99.605,23.925 84.905,23.925 82.1,23.925 82.1,25.805 cw(c83.37,25.805) 83.37,27.075 101.13,27.075 cw(c101.13,25.805) 102.4,25.805 ccw(c102.505,25.805) 102.505,25.7 112.08,25.7 ; 109.72,47.75 121.905,47.75 ; 109.72,47.75 121.905,47.75 ; 112.08,25.7 121.905,25.7 ccw(c121.905,26.97) 123.175,26.97 123.175,46.48 ccw(c121.905,46.48) 121.905,47.75

## Silkscreen, mask and mechanical layers (free items; w line width, h text height)
Top Overlay:
  drawing of 1817 lines, arcs and shapes, not listed
  text "ULTRA-MEGA-POWERSUPPLY" at 19.576,62.4 h3
  text "Designed by: Felipe Navarro" at 19.575,60.903 h2
  text "GND" at 66.125,60.35 h3 r90
  text "Oct/2016  V1.0" at 19.573,59 h2
  text "-12V" at 85.7,58.9 h3 r90
  text "+12V" at 103.7,58.8 h3 r90
  text "+" at 48.975,51.125 h5
  text "IOUT ADJ" at 78.725,35.575 h1.2
  text "+" at 41.225,30.325 h5
  text "VSENSE ADJ" at 99.9,25.225 h1.2
  text "VOUT ADJ" at 91.875,16.175 h1.2
  text "PSIN" at 79.575,14.525 h1.8
  text "IDAC" at 93.675,13.4 h1.2
  text "VDAC" at 96.225,13.4 h1.2
  text "ISENSE ADJ" at 125.95,9.525 h1.2 r90
  text "+PS-OUT" at 73.275,9.45 h3
  text "+" at 65.25,2.55 h5
  text "+" at 37.7,2.325 h5
  text "GNDP" at 52.125,1.725 h1.8
  text "-PS-OUT" at 119.45,0.8 h2.5 r90

## Text inside footprints (layer, text, board x,y; h text height)
CN1: Top Overlay "1" at 118.854,42.735 h1.5 r270; Top Overlay "2" at 121.461,42.997 h1.5 r270; Top Overlay "11" at 118.853,26.594 h1.5 r270; Top Overlay "12" at 121.492,26.657 h1.5 r270
CN7: Top Overlay "3" at 9.124,41.634 h1.5 r270; Top Overlay "1" at 9.124,51.657 h1.5 r270
Q1: Mechanical 15 "1" at 76.022,26.582 h1 r180; Mechanical 15 "2" at 74.182,26.533 h1 r180; Mechanical 15 "3" at 75.139,24.308 h1 r180
U7: Top Overlay "+" at 11.992,15.902 h1.6 r270; Top Overlay "~" at 11.858,20.962 h1.6 r270; Top Overlay "~" at 11.858,26.042 h1.6 r270; Top Overlay "-" at 11.858,31.102 h1.6 r270
U8: Top Overlay "+" at 18.742,56.081 h1.6 r90; Top Overlay "~" at 18.876,51.021 h1.6 r90; Top Overlay "~" at 18.876,45.941 h1.6 r90; Top Overlay "-" at 18.876,40.881 h1.6 r90